# EAGLE board Ribbon_Array_v22 (EAGLE 9.7.0)
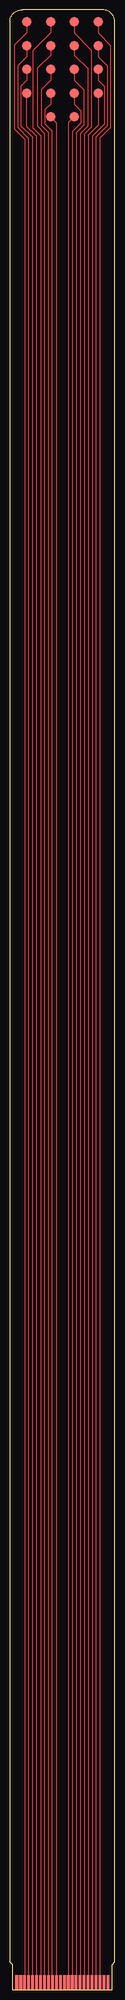
[diagram p0: board, top side]

Size 26.51 x 499.84 mm. Coordinates in mm from the lower left corner, seen from the top.
Outline: 26.51,7.03 26.51,496.78 arc90 23.46,499.83 3.19,499.83 arc90 0,497.14 0,7.07 0.73,6.33 0.73,0 25.81,0 25.81,6.33 26.51,7.03 26.51,7.03
Copper layers (1*16): Top / Bottom
Stack-up Default Layer Stack: Top User Defined 0.035mm / Dielectric-1 User Defined 1.5mm / Bottom User Defined 0.035mm
Design rules: minimum copper width 6mil, minimum drill size 0.35mm, copper clearance wire_polygon to wire_polygon 6mil, copper clearance wire_polygon to pad_smd 6mil, copper clearance wire_polygon to via 6mil, copper clearance pad_smd to pad_smd 6mil, copper clearance pad_smd to via 6mil, copper clearance via to via 6mil, copper clearance smd to pad (same net) 6mil, copper clearance smd to via (same net) 6mil, copper clearance smd to smd (same net) 6mil, dimension clearance 0mil, via restrict clearance 0mil, restrict clearance 0mil, drill distance 6mil, keepout clearance 0mil

## Footprints (pad centres in the part's own frame; a part is rotated, then mirrored left to right if it is on the bottom)
ELECTRODE3/32 = smd 2.381 x 2.381: P$1 0,0
24EDGE = smd 3.5 x 0.65: 1 0,11; 2 0,10; 3 0,9; 4 0,8; 5 0,7; 6 0,6; 7 0,5; 8 0,4; 9 0,3; 10 0,2; 11 0,1; 12 0,0; 13 0,-1; 14 0,-2; 15 0,-3; 16 0,-4; 17 0,-5; 18 0,-6; 19 0,-7; 20 0,-8; 21 0,-9; 22 0,-10; 23 0,-11; 24 0,-12

## Placement (x,y rotation side)
U$1  ELECTRODE3/32  [ELECTRODE3/32]  22.26,496.83 0 top
U$2  ELECTRODE3/32  [ELECTRODE3/32]  22.26,490.83 0 top
U$3  ELECTRODE3/32  [ELECTRODE3/32]  22.26,484.83 0 top
U$4  ELECTRODE3/32  [ELECTRODE3/32]  22.26,478.83 0 top
U$5  ELECTRODE3/32  [ELECTRODE3/32]  16.26,496.83 0 top
U$6  ELECTRODE3/32  [ELECTRODE3/32]  16.26,490.83 0 top
U$7  ELECTRODE3/32  [ELECTRODE3/32]  16.26,484.83 0 top
U$8  ELECTRODE3/32  [ELECTRODE3/32]  16.26,478.83 0 top
U$9  ELECTRODE3/32  [ELECTRODE3/32]  16.26,472.83 0 top
U$10  ELECTRODE3/32  [ELECTRODE3/32]  10.26,472.83 0 top
U$11  ELECTRODE3/32  [ELECTRODE3/32]  10.26,478.83 0 top
U$12  ELECTRODE3/32  [ELECTRODE3/32]  10.26,484.83 0 top
U$13  ELECTRODE3/32  [ELECTRODE3/32]  10.26,490.83 0 top
U$14  ELECTRODE3/32  [ELECTRODE3/32]  10.26,496.83 0 top
U$15  ELECTRODE3/32  [ELECTRODE3/32]  4.26,478.83 0 top
U$16  ELECTRODE3/32  [ELECTRODE3/32]  4.26,484.83 0 top
U$17  ELECTRODE3/32  [ELECTRODE3/32]  4.26,490.83 0 top
U$18  ELECTRODE3/32  [ELECTRODE3/32]  4.26,496.83 0 top
U$19  CONECTOR  [24EDGE]  13.73,1.87 270 top

## Library data of the parts
U$1-U$19 = Edge Connector

## Nets
N$1: U$1.P$1 U$19.3
N$2: U$2.P$1 U$19.4
N$3: U$3.P$1 U$19.5
N$4: U$4.P$1 U$19.6
N$5: U$5.P$1 U$19.7
N$6: U$6.P$1 U$19.8
N$7: U$7.P$1 U$19.9
N$8: U$8.P$1 U$19.10
N$9: U$9.P$1 U$19.11
N$10: U$10.P$1 U$19.14
N$11: U$11.P$1 U$19.15
N$12: U$12.P$1 U$19.16
N$13: U$13.P$1 U$19.17
N$14: U$14.P$1 U$19.18
N$15: U$15.P$1 U$19.19
N$16: U$16.P$1 U$19.20
N$17: U$17.P$1 U$19.21
N$18: U$18.P$1 U$19.22

## Tracks (layer width: path | path; a pad name or v marks a point on that pad's centre or on a via)
N$1
  Top 0.152: U$1.P$1 22.26,494.03 25.39,490.9 25.39,470.14 22.73,467.48 U$19.3
N$2
  Top 0.152: U$2.P$1 22.26,488.04 24.58,485.72 24.58,470.56 21.73,467.71 U$19.4
N$3
  Top 0.152: U$3.P$1 22.26,482.04 23.78,480.52 23.78,470.99 20.73,467.94 U$19.5
N$4
  Top 0.152: U$19.6 19.73,468.17 22.26,470.7 U$4.P$1
N$5
  Top 0.152: U$5.P$1 16.26,494.03 20.59,489.7 20.59,470.27 18.73,468.41 U$19.7
N$6
  Top 0.152: U$6.P$1 16.26,488.43 19.59,485.1 19.59,470.49 17.73,468.64 U$19.8
N$7
  Top 0.152: U$7.P$1 16.26,482.03 18.58,479.71 18.58,470.71 16.73,468.87 U$19.9
N$8
  Top 0.152: U$19.10 15.73,469.1 17.88,471.25 17.88,474.42 16.26,476.04 U$8.P$1
N$9
  Top 0.152: U$19.11 14.73,471.31 U$9.P$1
N$10
  Top 0.152: U$19.14 11.73,471.36 U$10.P$1
N$11
  Top 0.152: U$11.P$1 10.26,476.03 8.84,474.61 8.84,471.12 10.73,469.22 U$19.15
N$12
  Top 0.152: U$19.16 9.73,468.99 7.94,470.79 7.94,479.71 10.26,482.03 U$12.P$1
N$13
  Top 0.152: U$19.17 8.73,468.76 6.93,470.56 6.93,485.1 10.26,488.43 U$13.P$1
N$14
  Top 0.152: U$14.P$1 10.26,494.03 5.79,489.56 5.79,470.07 7.73,468.13 U$19.18
N$15
  Top 0.152: U$19.19 6.73,467.9 4.26,470.37 U$15.P$1
N$16
  Top 0.152: U$16.P$1 4.26,482.03 2.74,480.51 2.74,470.66 5.73,467.67 U$19.20
N$17
  Top 0.152: U$17.P$1 4.26,488.05 1.94,485.73 1.94,470.23 4.69,467.48 4.69,1.87 U$19.21
N$18
  Top 0.152: U$18.P$1 4.26,494.04 1.13,490.91 1.13,469.81 3.73,467.21 U$19.22